# Altium PCB PCB5.pcbdoc
Units mil, origin at the board's own origin, x right, y up, seen from the top; angles counter-clockwise.
Board outline 3780 x 2865 mil, 2 copper layers (Top Layer, Bottom Layer), stack 62.206 mil thick; 14 components, 11 nets, 79 pads, 40 vias.
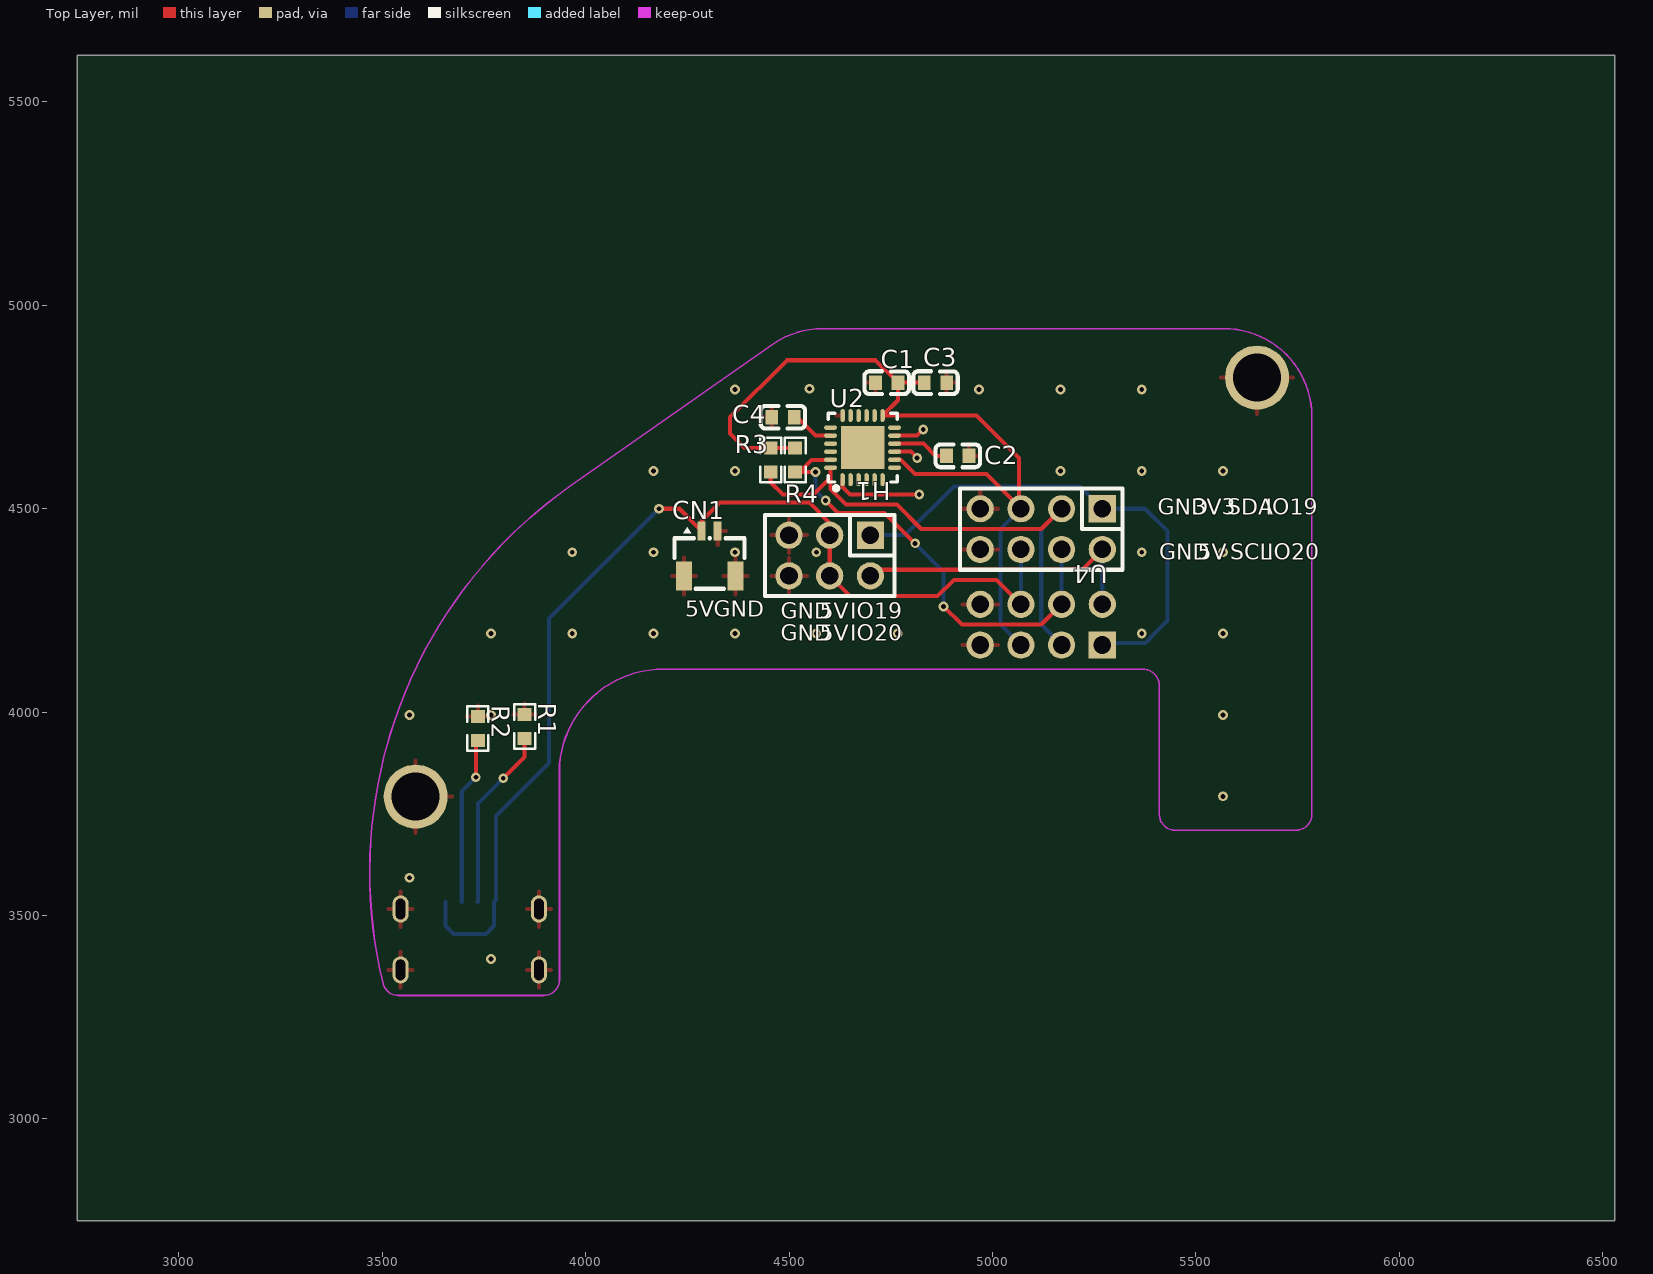
[diagram p0: Top Layer view]
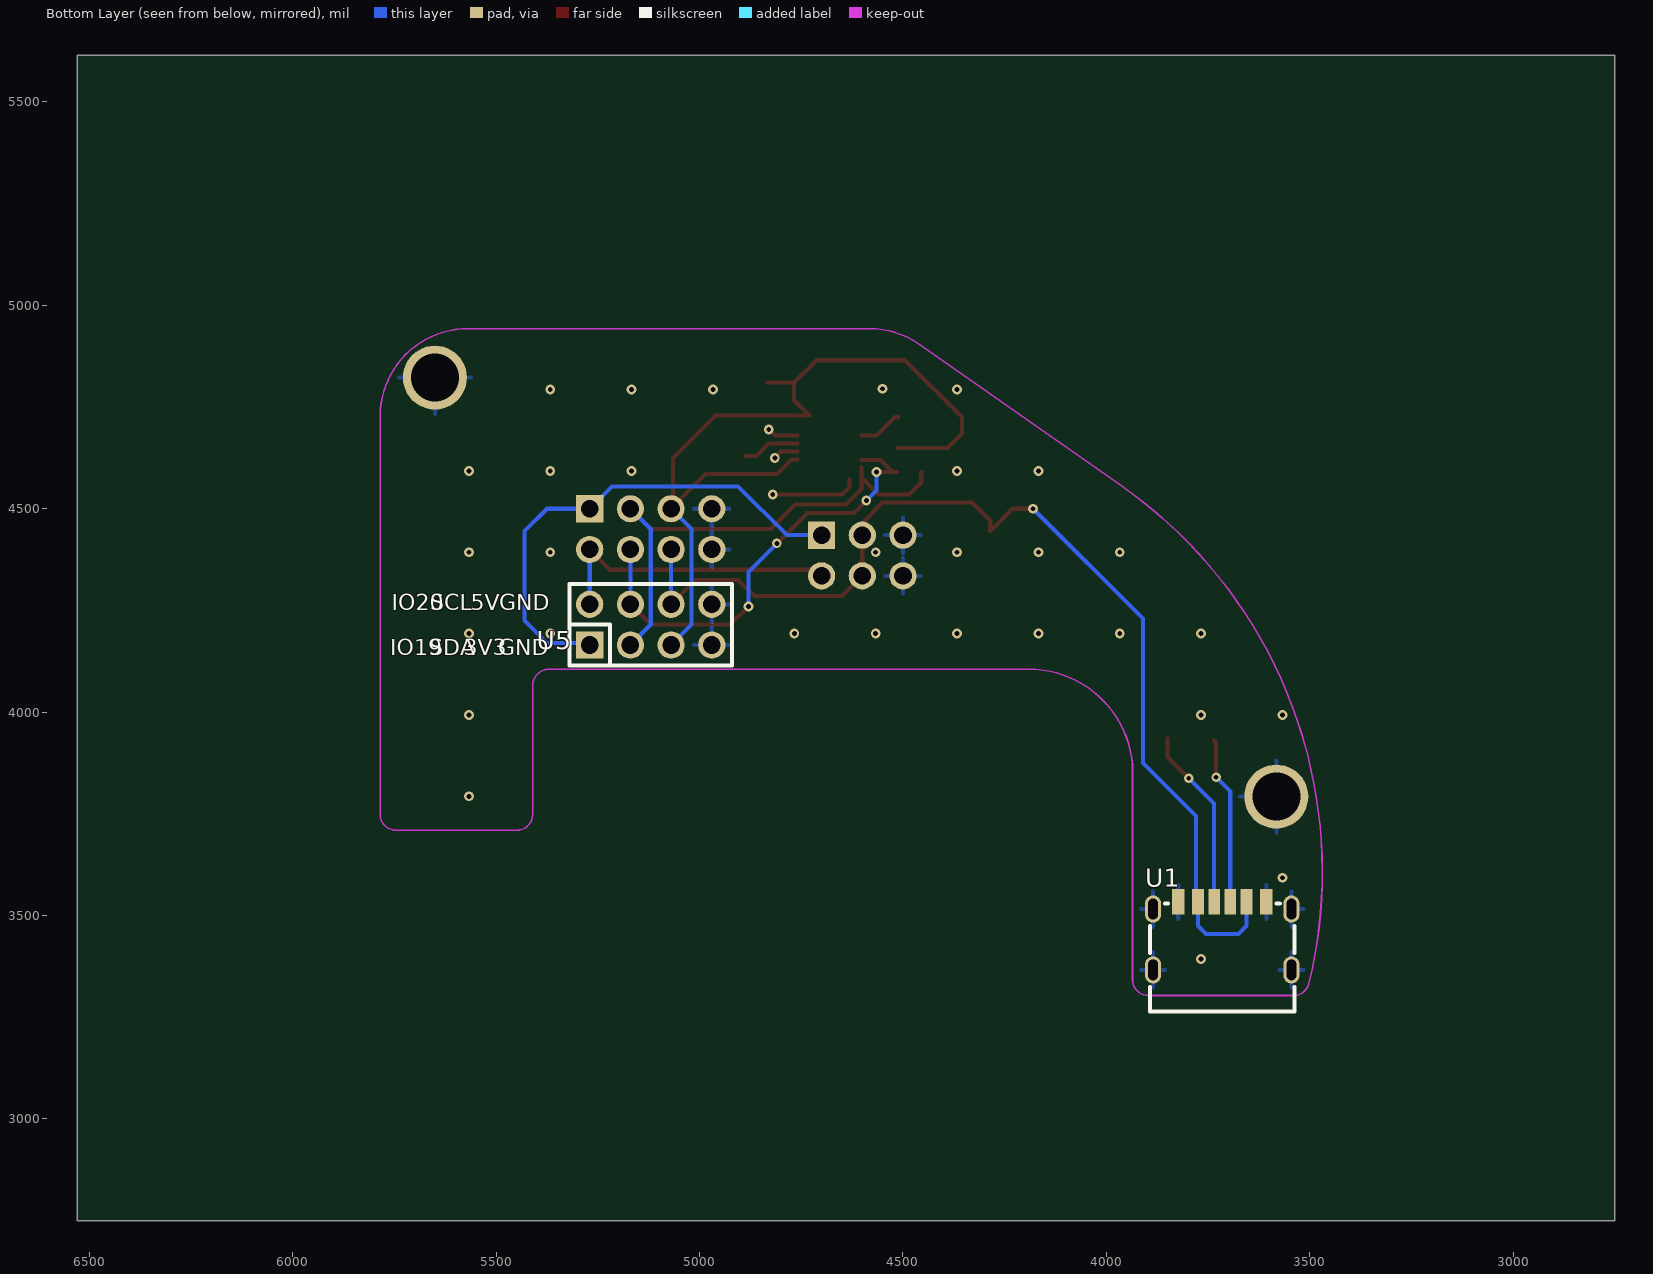
[diagram p1: Bottom Layer view, seen from below]

## Layer stack, top to bottom
Top Solder Mask Layer: solder mask 0.394, Dk 3.3
Top Layer: signal copper 1.379
Dielectric1: surface 59.449, FR4, Dk 4.5
Bottom Layer: signal copper 1.378
Bottom Solder Mask Layer: solder mask 0.394, Dk 3.3

## Board outline
6530,2750 2750,2750 2750,5615 6530,5615

## Design rules (kind name [scope] priority, off if disabled: settings)
BoardOutlineClearance copperThickness1oz [All] p0: genericclearance=10 ignorepadtopadclearanceinfootprint=FALSE except(0: Arc-SplitContinuation Track-SplitContinuation SMDPad-SplitContinuation THPad-SplitContinuation Via-SplitContinuation Fill-SplitContinuation Poly-SplitContinuation Region-SplitContinuation Text-SplitContinuation)
BoardOutlineClearance copperThickness2oz [All] p0: genericclearance=10 ignorepadtopadclearanceinfootprint=FALSE except(0: Arc-SplitContinuation Track-SplitContinuation SMDPad-SplitContinuation THPad-SplitContinuation Via-SplitContinuation Fill-SplitContinuation Poly-SplitContinuation Region-SplitContinuation Text-SplitContinuation)
BoardOutlineClearance otherClearance [All] p0: genericclearance=10 ignorepadtopadclearanceinfootprint=FALSE except(0: Arc-SplitContinuation Track-SplitContinuation SMDPad-SplitContinuation THPad-SplitContinuation Via-SplitContinuation Fill-SplitContinuation Poly-SplitContinuation Region-SplitContinuation Text-SplitContinuation)
Clearance copperThickness1oz [All] p1: gap=7 ignorepadtopadclearanceinfootprint=FALSE
Clearance copperThickness2oz [All] p1: gap=7 ignorepadtopadclearanceinfootprint=FALSE
Clearance otherClearance [All] p1: gap=7 ignorepadtopadclearanceinfootprint=FALSE
DiffPairsRouting differentialPair [All] p1: maxuncoupledlength=10 minlimit=6 maxlimit=Infinity mostfreqgap=6 toplayer_minwidth=5 toplayer_prefwidth=10 toplayer_maxwidth=100 bottomlayer_minwidth=5 bottomlayer_prefwidth=10 bottomlayer_maxwidth=100
PasteMaskExpansion pasteMaskExpansion [All] p1: expansion=0
PlaneConnect innerPlane [All] p1: planeconnectstyle=Relief reliefexpansion=20 reliefentries=4 reliefconductorwidth=10 reliefairgap=10
PolygonConnect copperRegion [All] p1: connectstyle=Relief reliefentries=4 reliefconductorwidth=10 polygonreliefangle="90 Angle" airgapwidth=10
RoutingVias viaSize [All] p1: viastyle="Through Hole" holewidth=12.0078 minholewidth=11.811 maxholewidth=248.0314 width=12.0078 minwidth=11.811 maxwidth=248.0314
SolderMaskExpansion solderMaskExpansion [All] p1: useseparateexpansions=TRUE expansion=2 expansionbottom=2
Width copperThickness1oz [All] p1: maxlimit=100 minlimit=5 preferedwidth=10
Width copperThickness2oz [All] p1: maxlimit=100 minlimit=8 preferedwidth=10

## Components (designator, comment, footprint, x,y, rotation, side; value= is the part's Value field where it differs from the comment)
C1 "" C0603 4740,4810 r0 top
C2 "" C0603 4915,4630 r180 top
C3 "" C0603 4860,4810 r180 top
C4 "" C0603 4485,4725 r0 top
CN1 "" CONN-SMD_2P-P1.00_HC-1.0-2PLT 4305,4390 r0 top
H1 "" HDR-TH_6P-P2.54-V-M-R2-C3-S2.54 4600,4385 r180 top
R1 "" R0603 3850,3965 r270 top
R2 "" R0603 3735,3960 r270 top
R3 "" R0603 4455,4620 r90 top
R4 "" R0603 4515,4620 r90 top
U1 "" TYPE-C-SMD_YIYUAN_YTC-TC6-268 3715,3450 r180 bottom
U2 "" QFN-24_L4.0-W4.0-P0.50-BL-EP2.7 4680.66,4650.33 r0 top
U4 "" HDR-TH_8P-P2.54-V-M-R2-C4-S2.54 5120,4450 r180 top
U5 "" HDR-TH_8P-P2.54-V-M-R2-C4-S2.54 5120,4215 r180 bottom

## Footprints (in the part's own frame and the unit in brackets; to place one, negate y for a bottom-side part, rotate by r counter-clockwise, add the part's x,y. Pads: shape width x height; smd on the part's side, far side on the other; paste and mask are expansions set on the pad)
C0603 [mm]
  rect 0.8x0.9 smd: 1(-0.7,0) 2(0.7,0)
  silkscreen extent -1.39,-0.71 1.39,0.71
CONN-SMD_2P-P1.00_HC-1.0-2PLT [mm]
  rect 0.5x1.2 smd: 1(-0.5,1.4) 2(0.5,1.4)
  rect 1x1.8 smd: 3(1.61,-1.4) 4(-1.61,-1.4)
  silkscreen extent -2.2,-2.2 2.16,1.65
HDR-TH_6P-P2.54-V-M-R2-C3-S2.54 [mm]
  rect 1.7x1.7 hole 1.1: 1(-2.54,-1.27)
  round 1.7 hole 1.1: 2(-2.54,1.27) 3(0,-1.27) 4(0,1.27) 5(2.54,-1.27) 6(2.54,1.27)
  silkscreen extent -4.04,-2.54 4.04,2.54
HDR-TH_8P-P2.54-V-M-R2-C4-S2.54 [mm]
  rect 1.7x1.7 hole 1.1: 1(-3.81,-1.27)
  round 1.7 hole 1.1: 2(-3.81,1.27) 3(-1.27,-1.27) 4(-1.27,1.27) 5(1.27,-1.27) 6(1.27,1.27) 7(3.81,-1.27) 8(3.81,1.27)
  silkscreen extent -5.08,-2.54 5.08,2.54
QFN-24_L4.0-W4.0-P0.50-BL-EP2.7 [mm]
  oval 0.28x0.8 smd: 1(-1.25,-2) 2(-0.75,-2) 3(-0.25,-2) 4(0.25,-2) 5(0.75,-2) 6(1.25,-2) 13(1.25,2) 14(0.75,2) 15(0.25,2) 16(-0.25,2) 17(-0.75,2) 18(-1.242,2)
  oval 0.8x0.28 smd: 7(2,-1.25) 8(2,-0.75) 9(2,-0.25) 10(2,0.25) 11(2,0.75) 12(2,1.25) 19(-2,1.25) 20(-2,0.75) 21(-2,0.25) 22(-2,-0.25) 23(-2,-0.75) 24(-2,-1.25)
  rect 2.7x2.7 smd: 25(0.012,0)
  silkscreen extent -2.14,-2.79 2.16,2.15
R0603 [mil]
  rect 31.75x34.02 smd: 1(-29.66,0) 2(29.66,0)
  silkscreen extent -55,-26 55,26
TYPE-C-SMD_YIYUAN_YTC-TC6-268 [mm]
  oval 1x1.7 hole 0.6 slot 1.3 at 90 deg: 1(-4.32,1.676) 2(4.32,1.676) 3(4.32,-2.125) 4(-4.32,-2.125)
  rect 0.7x1.6 smd: A5(-0.5,2.125) B5(0.5,2.125)
  rect 0.76x1.6 smd: A9(1.52,2.125) B9(-1.52,2.125)
  rect 0.8x1.6 smd: A12(2.75,2.125) B12(-2.75,2.125)
  silkscreen extent -4.5,-4.72 4.5,2.03

## Free pads (board coordinates)
  round 157.48 hole 118.11: ""(3582.17,3792.31) ""(5650.54,4822.36)

## Via types
v1: diameter 24.02, hole 12.01, Top Layer to Bottom Layer, 40 vias

## Nets (pads, with @x,y where several pads share a name; then routed paths per layer and width w, separated by ;. In a path a pad name is that pad's centre, name@x,y a point inside that pad or via, vN(x,y) a via of type N, cw(c..) or ccw(c..) an arc to the next point about the centre after c; other vN are vias at no path point)
3V3: C1.2 C3.2 R3.2 R4.2 U2.8 U2.13 U4.5 U5.5 | length 2104.7
  Top Layer w10: R4.2 R3.2 4390.34,4649.66 4355,4685 4355,4725 4495,4865 4712.56,4865 C1.2 ; U2.8 4774.2,4620.8 4810,4585 4985,4585 U4.5@5065,4505 ; C3.2 C1.2 ; U4.5 U4.5@5065,4505 ; C1.2 4767.56,4766.76 U2.13 4960.93,4729.07 5065,4625 U4.5@5065,4505
  Bottom Layer w10: U5.5 5020,4215 5020,4450 U4.5
$1N19: C4.2 U2.20 | length 108.1
  Top Layer w10: C4.2 4520,4725 4565.14,4679.86 U2.20
$1N24: C2.2 U2.10 | length 140.5
  Top Layer w10: U2.10 4759.57,4660 4830,4660 4860,4630 C2.2
$1N166: R2.2 U1.B5 | length 413.1
  Top Layer w10: v1(3730,3840) 3730,3925.34 R2.2
  Bottom Layer w10: U1.B5 3695.32,3805.32 v1(3730,3840)
$1N167: R1.2 U1.A5 | length 449.5
  Top Layer w10: v1(3797.5,3837.5) 3850,3890 R1.2
  Bottom Layer w10: U1.A5 3735,3533.96 3735,3775 v1(3797.5,3837.5)
GND: C1.1 C2.1 C3.1 C4.1 CN1.2 CN1.3 CN1.4 H1.5 H1.6 pad. R1.1 R2.1 U1.1 U1.2 U1.3 U1.4 U1.A12 U1.B12 U2.1 U2.9 U2.11 U2.18 U4.7 U4.8 U5.7 U5.8 | length 353.2
  Top Layer w10: U2.1 4631.45,4553.55 4650,4535 v1(4820,4535) ; U2.9 4799.51,4640.49 v1(4815,4625) ; U2.11 4814.86,4679.86 v1(4830,4695)
  other v1: 3767.01,3392.99 3567.01,3592.99 5567.01,3792.99 3567.01,3992.99 3767.01,3992.99 5567.01,3992.99 3767.01,4192.99 3967.01,4192.99 4167.01,4192.99 4367.01,4192.99 4567.01,4192.99 4767.01,4192.99 5367.01,4192.99 5567.01,4192.99 3967.01,4392.99 4167.01,4392.99 4367.01,4392.99 4567.01,4392.99 5367.01,4392.99 5567.01,4392.99 4167.01,4592.99 4367.01,4592.99 5167.01,4592.99 5367.01,4592.99 5567.01,4592.99 4367.01,4792.99 4967.01,4792.99 5167.01,4792.99 5367.01,4792.99 4550,4795
I2C0_SCL: R4.1 U2.23 U4.4 U5.4 | length 1131.7
  Top Layer w10: R4.1 R4.1@4525.34,4590.34 ; v1(4565,4590.34) R4.1@4525.34,4590.34 ; v1(4590,4520) 4620,4490 4735,4490 v1(4810,4415) ; U2.23 4601.12,4620 4555,4620 R4.1@4525.34,4590.34 ; v1(4880,4260) 4925,4215 5120,4215 U5.4
  Bottom Layer w10: v1(4565,4590.34) 4565,4545 v1(4590,4520) ; v1(4810,4415) 4880,4345 v1(4880,4260) ; U5.4 U4.4
I2C0_SDA: R3.1 U2.24 U4.3 U5.3 | length 1260.9
  Top Layer w10: R3.1 4455,4565 4485,4535 4560,4535 4601.92,4576.92 ; U2.24 4601.92,4576.92 ; U4.3 5120,4450 4825,4450 4765,4510 4640,4510 4601.92,4548.08 4601.92,4576.92
  Bottom Layer w10: U5.3 5120,4215 5120,4450 U4.3
SERVO1: H1.1 U4.1 U5.1 | length 1231
  Bottom Layer w10: H1.1 4785,4435 4905,4555 5215,4555 U4.1 5375,4500 5430,4445 5430,4225 5390,4185 5390,4183.47 5376.53,4170 5275,4170 U5.1
SERVO2: H1.2 U4.2 U5.2 | length 731.9
  Top Layer w10: H1.2 4715,4350 5220,4350 U4.2
  Bottom Layer w10: U5.2 U4.2
VCC_5V: CN1.1 H1.3 H1.4 U1.A9 U1.B9 U4.6 U5.6 | length 2692.2
  Top Layer w10: v1(4180,4500) 4230.44,4500 CN1.1 4285.32,4470.32 4330,4515 4550,4515 4600,4465 H1.3 H1.4 4650,4285 4865,4285 4905,4325 5010,4325 U5.6
  Bottom Layer w10: U1.A9 3655.16,3474.84 3675,3455 3755,3455 3774.84,3474.84 U1.B9 3780,3538.8 3780,3745 3910,3875 3910,4230 v1(4180,4500) ; U5.6 U4.6
pads on no net: U2.2 U2.3 U2.4 U2.5 U2.6 U2.7 U2.12 U2.14 U2.15 U2.16 U2.17 U2.19 U2.21 U2.22 U2.25

## Polygon pours and split planes (outlines as drawn)
GND on Bottom Layer (solid, remove dead copper, pour order 2): 3125,5230 6145,5230 6145,3085 3125,3085
GND on Top Layer (solid, remove dead copper, pour order 0): 3000,5365 6280,5365 6280,3000 3000,3000

## Keep-outs
Board Outline Layer:
  lines w3.94: 3473.48,3505.44 ccw(c4627.5,3607.6) 3501.97,3333.03 ccw(c3539.73,3342.24) 3539.73,3303.37 3896.77,3303.37 ccw(c3896.77,3342.24) 3935.64,3342.24 3935.62,3870.34 cw(c4190.7,3849.77) 4190.7,4105.68 5369.01,4105.68 cw(c5369.01,4064.34) 5410.35,4064.34 5410.35,3748.61 ccw(c5449.22,3748.61) 5449.22,3709.74 5746.57,3709.74 ccw(c5746.57,3748.61) 5785.44,3748.61 5785.44,3944.56 5785.4,4611.28 5785.32,4727.12 ccw(c5569.54,4727.11) 5569.58,4942.89 4581.73,4943 ccw(c4583.02,4727.26) 4461.52,4905.54 3962.88,4556.35 ccw(c4627.2,3607.56) 3518.99,3944.28 ccw(c4627.18,3607.57) 3505.24,3895.15 ccw(c4639.98,3606.52) 3473.48,3505.44

## Silkscreen, mask and mechanical layers (free items; w line width, h text height)
Top Silkscreen Layer:
  text "GND" at 5407.01,4485.38 h39.37
  text "3V3" at 5492.01,4485.38 h39.37
  text "SDA" at 5577.01,4485.38 h39.37
  text "IO19" at 5672.01,4485.38 h39.37
  text "GND" at 5410,4375 h39.37
  text "5V" at 5505,4375 h39.37
  text "SCL" at 5585,4375 h39.37
  text "IO20" at 5675,4375 h39.37
  text "5V" at 4245,4235 h39.37
  text "GND" at 4315,4235 h39.37
  text "GND" at 4480,4230 h39.37
  text "5V" at 4575,4230 h39.37
  text "IO19" at 4650,4230 h39.37
  text "GND" at 4480,4175 h39.37
  text "5V" at 4575,4175 h39.37
  text "IO20" at 4650,4175 h39.37
Bottom Silkscreen Layer:
  text "GND" at 5492.01,4250.38 h39.37
  text "5V" at 5562.01,4250.38 h39.37
  text "SCL" at 5662.01,4250.38 h39.37
  text "IO20" at 5757.01,4250.38 h39.37
  text "GND" at 5495,4140 h39.37
  text "3V3" at 5580,4140 h39.37
  text "SDA" at 5665,4140 h39.37
  text "IO19" at 5760,4140 h39.37